# Altium PCB LoRaBoard.PcbDoc
Units mm, origin at the board's own origin, x right, y up, seen from the top; angles counter-clockwise.
Board outline 58.04 x 47.37 mm, 2 copper layers (Top Layer, Bottom Layer); 1 components, 7 nets, 21 pads, 0 vias.
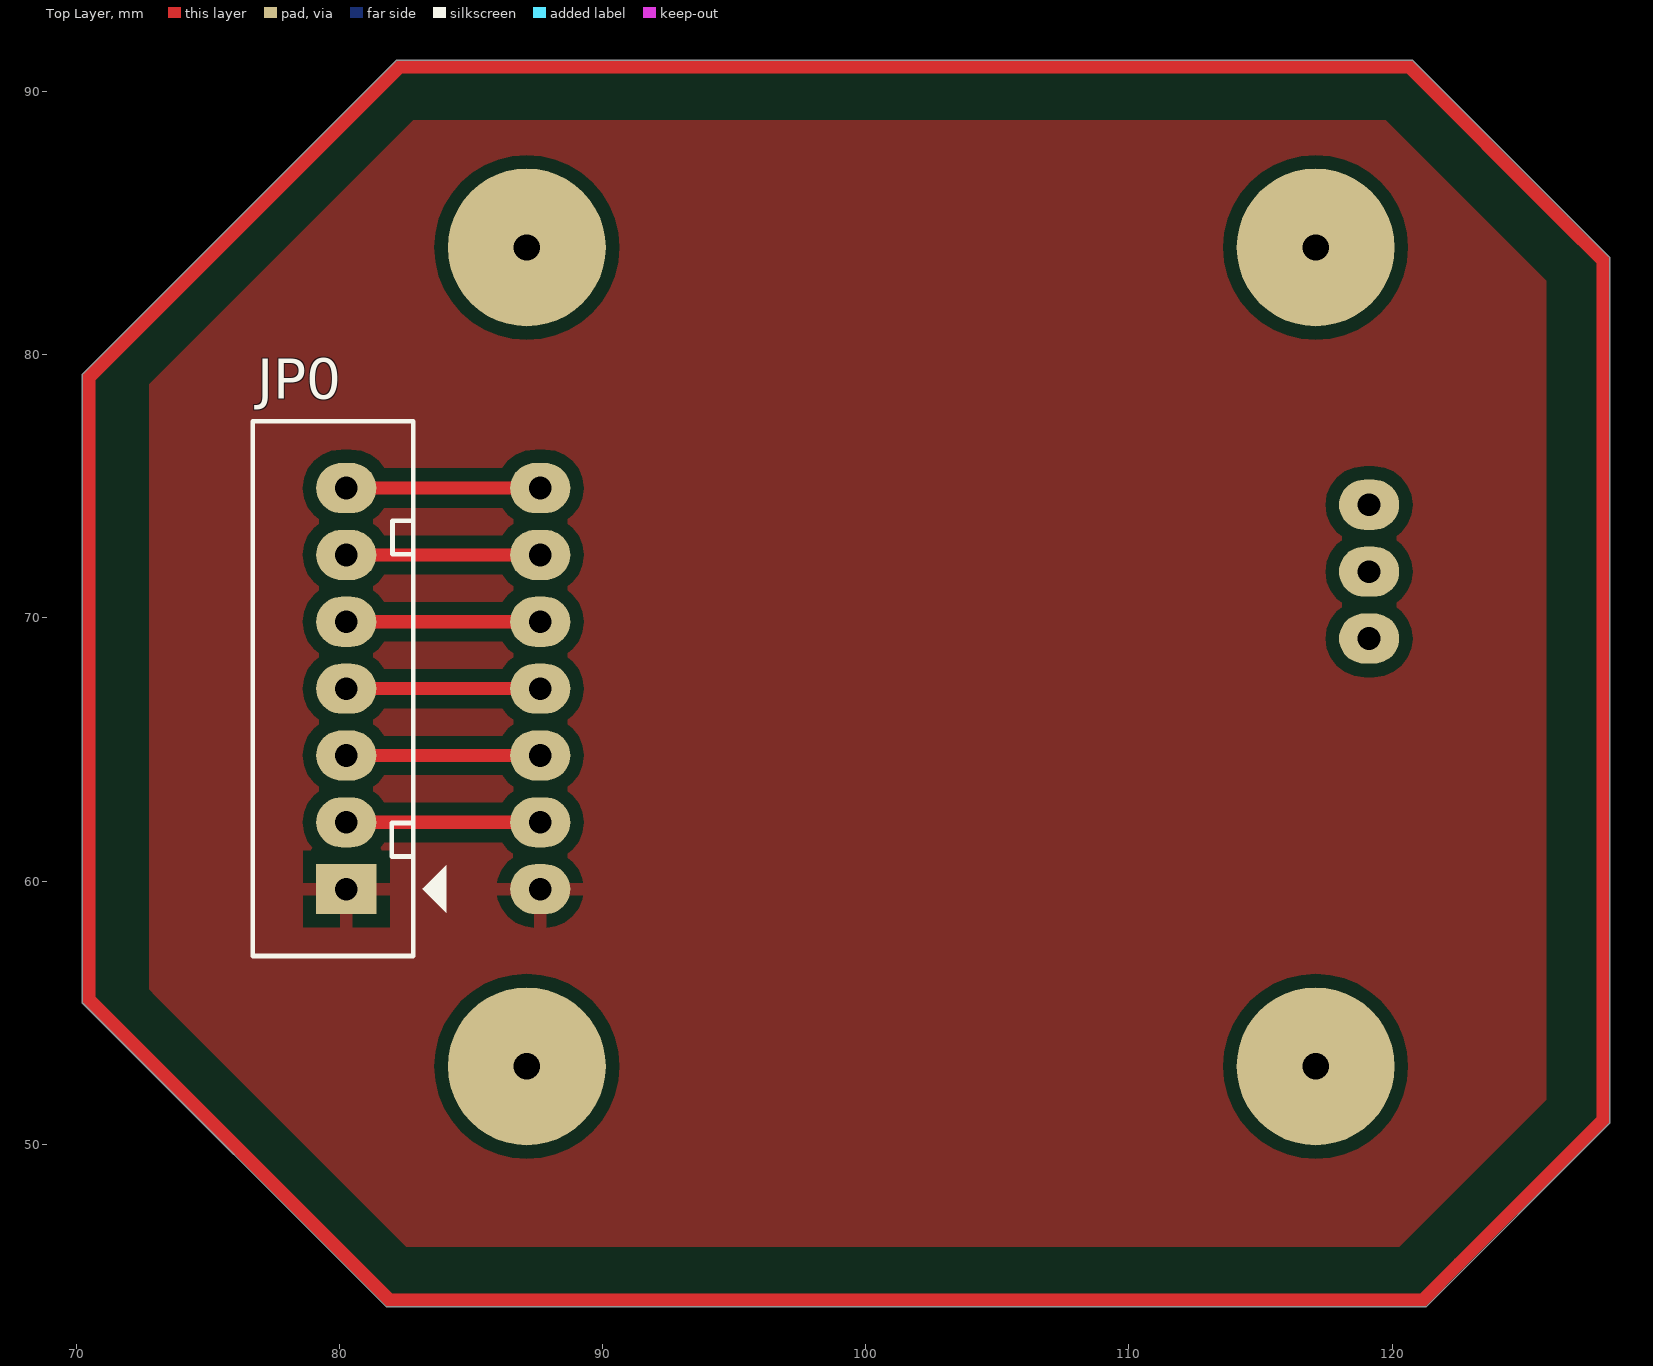
[diagram p0: Top Layer view]
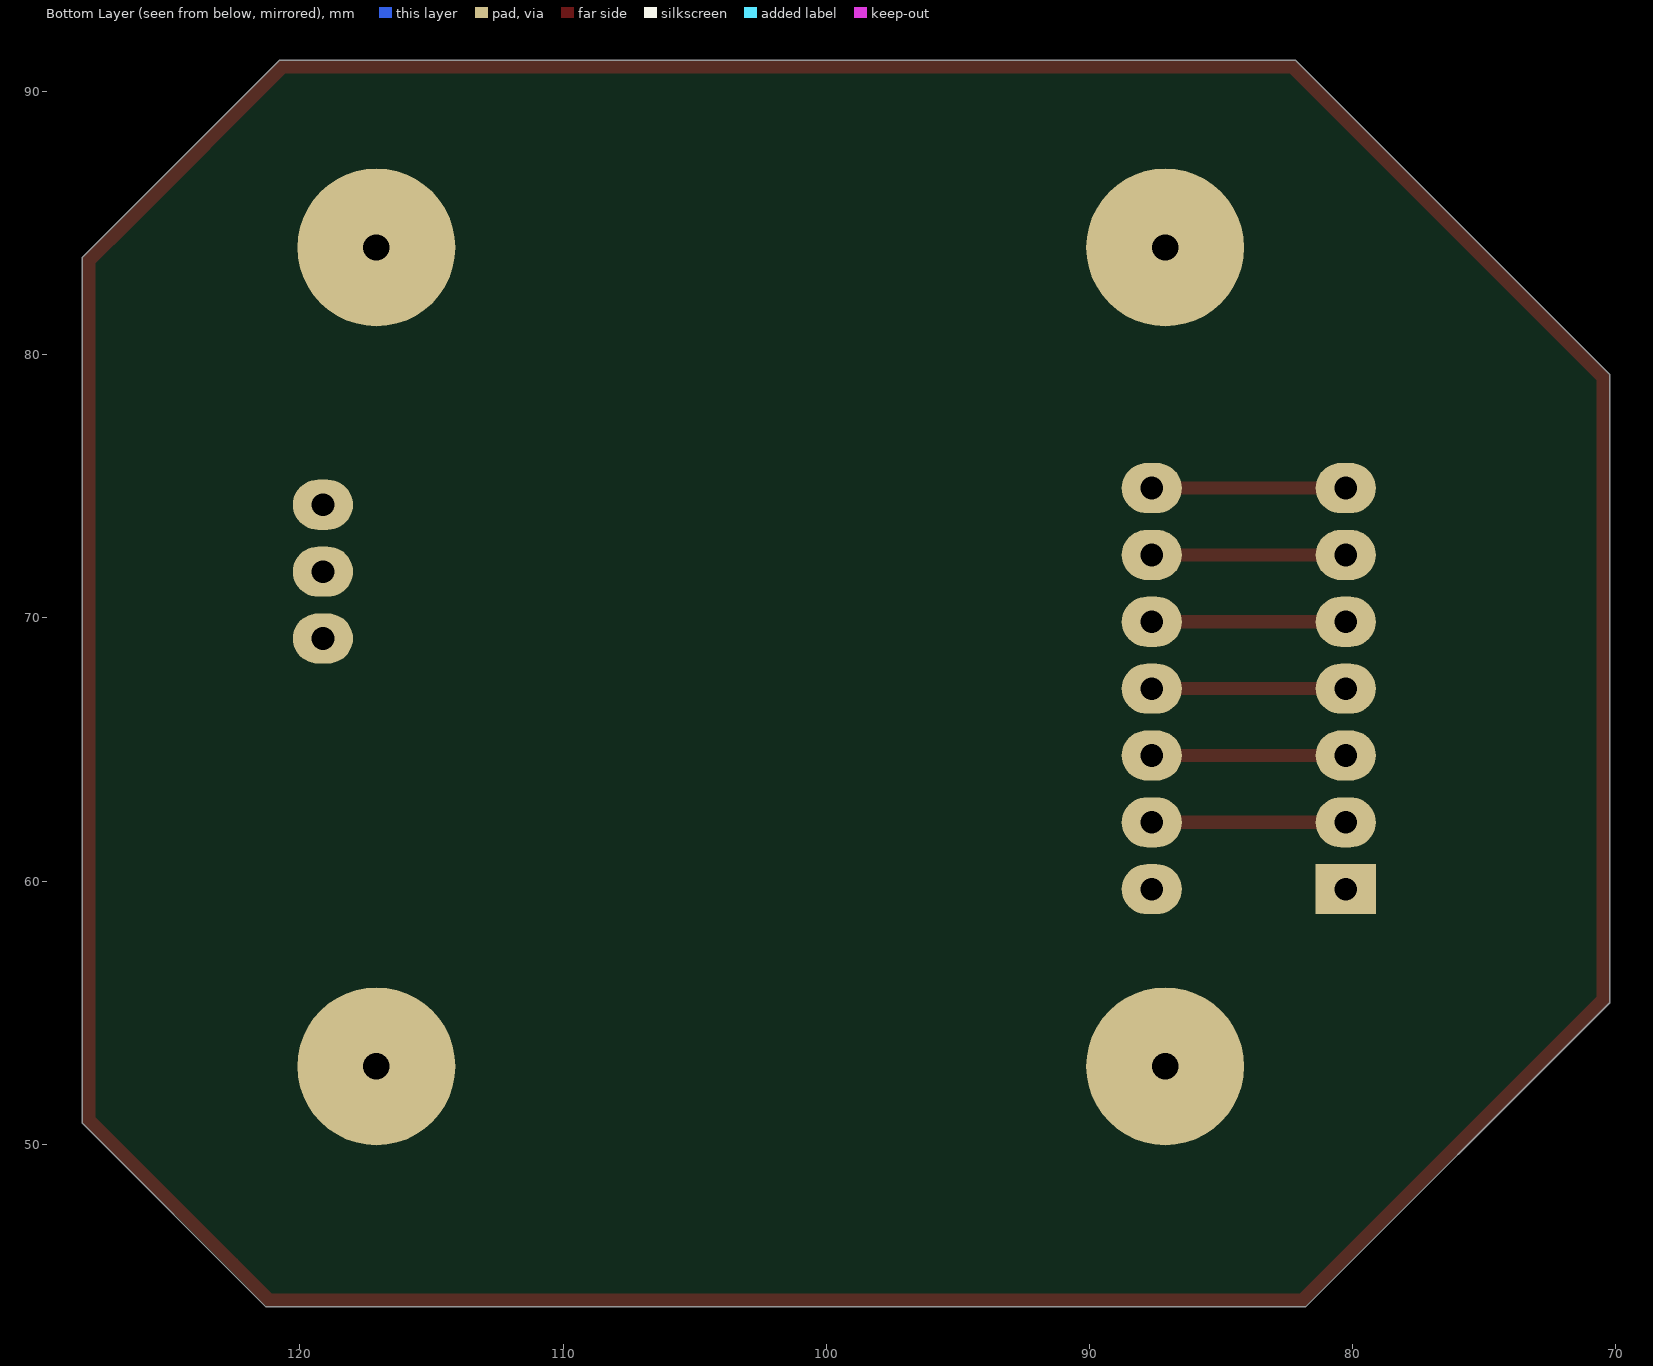
[diagram p1: Bottom Layer view, seen from below]

## Layer stack, top to bottom
Top Solder: solder mask 0.0102, Solder Resist, Dk 3.5
Top Layer: signal copper 0.0356
Dielectric 1: dielectric 0.32, FR-4, Dk 4.8
Bottom Layer: signal copper 0.0356
Bottom Solder: solder mask 0.0102, Solder Resist, Dk 3.5

## Board outline
82.169,91.186 120.777,91.186 128.27,83.693 128.27,50.8 121.285,43.815 81.788,43.815 70.231,55.372 70.231,79.248

## Design rules (kind name [scope] priority, off if disabled: settings)
Clearance [All] p1: gap=0.5
DiffPairsRouting [All] p1: maxlimit=0.5 minlimit=0.5 mostfreqgap=0.5 toplayer_minwidth=0.5 toplayer_maxwidth=0.5 toplayer_prefwidth=0.5 bottomlayer_minwidth=0.5 bottomlayer_maxwidth=0.5 bottomlayer_prefwidth=0.5 maxuncoupledlength=12.7
PolygonConnect [All] p1: connectstyle=Relief reliefconductorwidth=0.5 reliefentries=4 polygonreliefangle="90 Angle" airgapwidth=0.5
RoutingLayers [All] p1: top layer_v5=TRUE bottom layer_v5=FALSE
RoutingVias [All] p1: holewidth=0.711 width=1.27 viastyle="Through Hole" minholewidth=0.711 minwidth=1.27 maxholewidth=0.711 maxwidth=1.27
SolderMaskExpansion [All] p1: expansion=0.102
Width [All] p1: maxlimit=0.5 minlimit=0.5 preferedwidth=0.5
28 further rules are at their usual default settings.

## Components (designator, comment, footprint, x,y, rotation, side; value= is the part's Value field where it differs from the comment)
JP0 "LORA" CON7 80.264,59.69 r90 top

## Footprints (in the part's own frame and the unit in brackets; to place one, negate y for a bottom-side part, rotate by r counter-clockwise, add the part's x,y. Pads: shape width x height; smd on the part's side, far side on the other; paste and mask are expansions set on the pad)
CON7 [mil] "CON7"
  rect 75x90 hole 34: 1(0,0)
  oval 75x90 hole 34: 2(100,0) 3(200,0) 4(300,0) 5(400,0) 6(500,0) 7(600,0)
  silkscreen extent -100,-150 700,140

## Part data
JP0: library part Con7, "Connector 7"

## Free pads (board coordinates)
  round 6 hole 1: ""(87.122,52.959) ""(87.122,84.074) ""(117.094,52.959) ""(117.094,84.074)
  oval 2.286x1.905 hole 0.864: ""(87.63,59.69) ""(87.63,62.23) ""(87.63,64.77) ""(87.63,67.31) ""(87.63,69.85) ""(87.63,72.39) ""(87.63,74.93) ""(119.126,69.215) ""(119.126,71.755) ""(119.126,74.295)

## Nets (pads, with @x,y where several pads share a name; then routed paths per layer and width w, separated by ;. In a path a pad name is that pad's centre, name@x,y a point inside that pad or via, vN(x,y) a via of type N, cw(c..) or ccw(c..) an arc to the next point about the centre after c; other vN are vias at no path point)
AUX: JP0.3 pad.@87.63,64.77 | length 7.4
  Top Layer w0.5: JP0.3 pad.@87.63,64.77
GND: JP0.1 pad.@87.63,59.69
M0: JP0.7 pad.@87.63,74.93 | length 7.4
  Top Layer w0.5: JP0.7 pad.@87.63,74.93
M1: JP0.6 pad.@87.63,72.39 | length 7.4
  Top Layer w0.5: JP0.6 pad.@87.63,72.39
RXD: JP0.5 pad.@87.63,69.85 | length 7.4
  Top Layer w0.5: JP0.5 pad.@87.63,69.85
TXD: JP0.4 pad.@87.63,67.31 | length 7.4
  Top Layer w0.5: JP0.4 pad.@87.63,67.31
VCC: JP0.2 pad.@87.63,62.23 | length 7.4
  Top Layer w0.5: JP0.2 pad.@87.63,62.23
copper on no net: | length 186.8
  Top Layer w0.5: 70.485,55.499 81.915,44.069 121.158,44.069 122.555,45.466 128.016,50.927 128.016,52.451 128.016,83.566 126.492,85.09 120.65,90.932 82.296,90.932 70.485,79.121 70.485,78.232 70.485,55.499

## Polygon pours and split planes (outlines as drawn)
GND on Top Layer "TOP" (solid, pour order 0): 72.771,77.597 72.771,78.867 81.915,88.011 82.804,88.9 117.729,88.9 119.761,88.9 125.603,83.058 125.857,82.804 125.857,60.706 125.857,51.689 121.412,47.244 120.269,46.101 104.902,46.101 82.55,46.101 73.025,55.626 72.771,55.88 72.771,78.613